# Altium PCB mic_usb_assy.PcbDoc
Units mm, origin at the board's own origin, x right, y up, seen from the top; angles counter-clockwise.
Board outline 18.15 x 36.98 mm, 2 copper layers (Top Layer, Bottom Layer), stack 0.8 mm thick; 3 components, 5 nets, 22 pads, 16 vias.
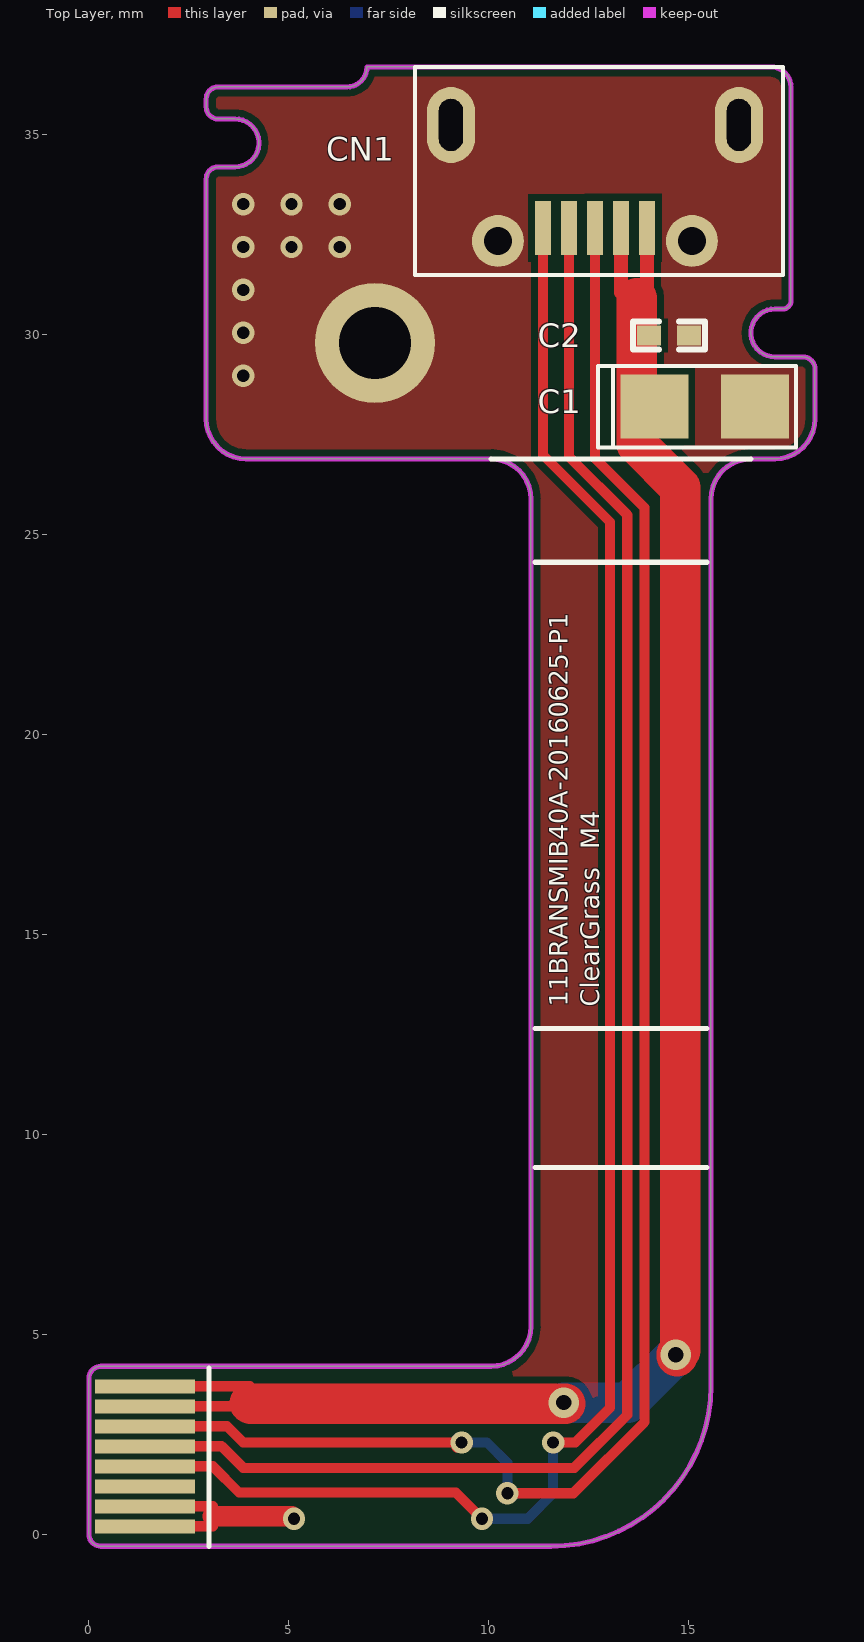
[diagram p0: Top Layer view]
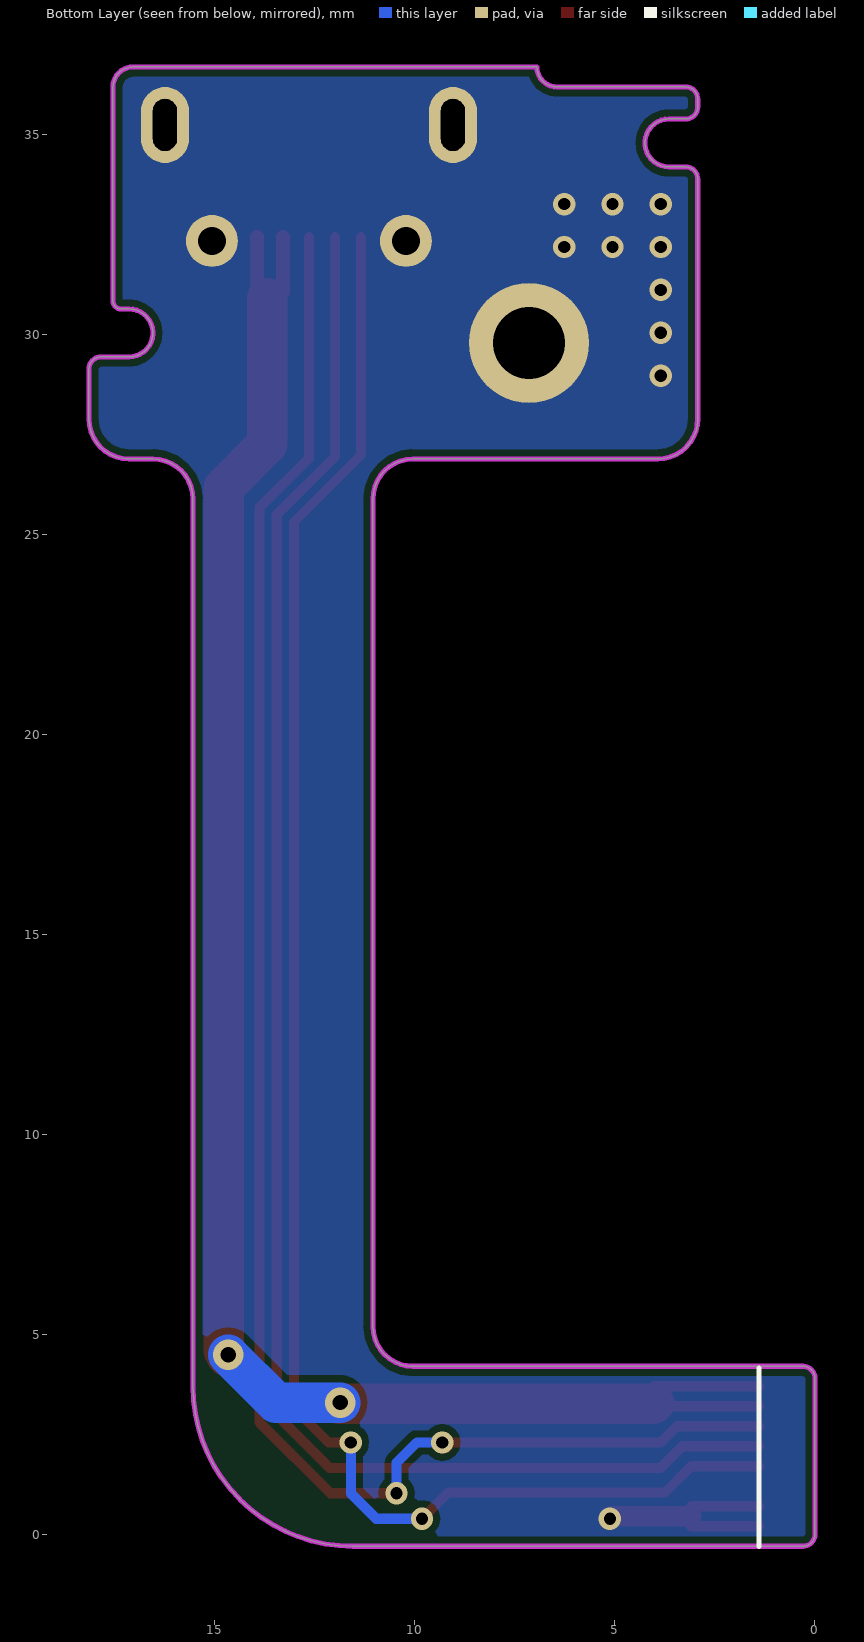
[diagram p1: Bottom Layer view, seen from below]

## Layer stack, top to bottom
Top Layer: signal copper 0.0356
Dielectric: core 0.729, FR-4, Dk 4.8
Bottom Layer: signal copper 0.0356

## Board outline
0.3,-0.3 cw(c0.3,0) 0,0 0,3.9 cw(c0.3,3.9) 0.3,4.2 10.05,4.2 ccw(c10.05,5.2) 11.05,5.2 11.05,25.883 ccw(c10.05,25.883) 10.05,26.883 3.93,26.883 cw(c3.93,27.883) 2.93,27.883 2.93,33.883 cw(c3.23,33.883) 3.23,34.183 3.65,34.183 ccw(c3.65,34.783) 3.65,35.383 3.23,35.383 cw(c3.23,35.683) 2.93,35.683 2.93,35.883 cw(c3.23,35.883) 3.23,36.183 6.45,36.183 ccw(c6.45,36.683) 6.95,36.683 17.05,36.683 cw(c17.05,36.183) 17.55,36.183 17.55,30.833 cw(c17.35,30.833) 17.35,30.633 17.15,30.633 ccw(c17.15,30.033) 17.15,29.433 17.85,29.433 cw(c17.85,29.133) 18.15,29.133 18.15,27.883 cw(c17.15,27.883) 17.15,26.883 16.55,26.883 ccw(c16.55,25.883) 15.55,25.883 15.55,3.7 cw(c11.55,3.7) 11.55,-0.3

## Design rules (kind name [scope] priority, off if disabled: settings)
Clearance [All] p1: gap=0.178
MinimumSolderMaskSliver [All] p1: minsoldermaskwidth=0
PolygonConnect [All] p1: connectstyle=Direct reliefconductorwidth=1.5 reliefentries=4 polygonreliefangle="90 Angle"
RoutingVias [All] p1: holewidth=0.711 width=1.27 viastyle="Through Hole" minholewidth=0.305 minwidth=0.559 maxholewidth=0.711 maxwidth=1.27
SilkToSilkClearance [All] p1: silktosilkclearance=0
SilkscreenOverComponentPads [IsPad] p1: minsilkscreentomaskgap=0
SolderMaskExpansion [All] p1: expansion=0.102
Width [All] p1: maxlimit=3 minlimit=0.254 preferedwidth=0.254
25 further rules are at their usual default settings.

## Components (designator, comment, footprint, x,y, rotation, side; value= is the part's Value field where it differs from the comment)
C1 "10uF/10V" 3216 15.391,28.19 r0 top
C2 "0.1uF" 0402C 14.502,29.968 r180 top
CN1 "475900001" MICRO-USB-乐沪 12.65,33.783 r180 top

## Footprints (in the part's own frame and the unit in brackets; to place one, negate y for a bottom-side part, rotate by r counter-clockwise, add the part's x,y. Pads: shape width x height; smd on the part's side, far side on the other; paste and mask are expansions set on the pad)
0402C [mm]
  rect 0.6x0.5 smd: 1(-0.5,0) 2(0.5,0)
  silkscreen extent -0.9,-0.35 0.9,0.35, body extent -0.51,-0.25 0.51,0.25, height 0.5
3216 [mm]
  rect 1.7x1.6 smd: 1(-1.256,0) 2(1.256,0)
  silkscreen extent -2.67,-1.02 2.29,1.02, body extent -1.72,-0.85 1.72,0.85, height 1.8
MICRO-USB-乐沪 [mm]
  rect 0.4x1.35 smd: 1(-1.3,1.125) 2(-0.65,1.125) 3(0,1.125) 4(0.65,1.125) 5(1.3,1.125)
  round 1.3 hole 0.7: 6(-2.425,1.45) 7(2.425,1.45)
  oval 1.2x1.9 hole 0.6 slot 1.3 at 90 deg: 8(-3.6,-1.45) 9(3.6,-1.45)
  silkscreen extent -4.7,-2.9 4.5,2.3

## Part data
C1: library part Capacitor
CN1: library part 47590

## Free pads (board coordinates)
  round 3 hole 1.8: 0(7.15,29.783)
  rect 2.5x0.35 smd: 1(1.4,3.7) 2(1.4,3.2) 3(1.4,2.7) 4(1.4,2.2) 5(1.4,0.2) 5(1.4,1.7) 6(1.4,1.2) 7(1.4,0.7)

## Via types
v1: diameter 0.559, hole 0.305, Top Layer to Bottom Layer, 14 vias
v2: diameter 0.762, hole 0.381, Top Layer to Bottom Layer, 2 vias

## Nets (pads, with @x,y where several pads share a name; then routed paths per layer and width w, separated by ;. In a path a pad name is that pad's centre, name@x,y a point inside that pad or via, vN(x,y) a via of type N, cw(c..) or ccw(c..) an arc to the next point about the centre after c; other vN are vias at no path point)
GND: C1.2 C2.1 CN1.6 CN1.7 CN1.8 CN1.9 pad.0 pad.5@1.4,0.2 pad.7 | length 5.9
  Top Layer w0.254: pad.5@1.4,0.2 3.094,0.2 3.094,0.45 3.094,0.7 pad.7
  Top Layer w0.508: 3.094,0.45 v1@5.066,0.45
  other v1: 5.126,0.39 3.856,28.965 3.856,30.037 3.856,31.109 3.856,32.182 5.063,32.182 6.269,32.182 3.856,33.254 5.063,33.254 6.269,33.254
MICRO_ID: CN1.5 pad.5@1.4,1.7 | length 44
  Top Layer w0.254: pad.5@1.4,1.7 3.094,1.7 3.749,1.045 9.17,1.045 v1(9.825,0.39) ; CN1.5@11.35,32.433 11.35,26.981 13.025,25.305 13.025,13.652 13.024,13.651 13.024,3.16 12.16,2.295 v1(11.603,2.295)
  Bottom Layer w0.254: v1(9.825,0.39) 10.968,0.39 11.603,1.025 v1(11.603,2.295)
MICRO_N: CN1.3 pad.3 | length 44.7
  Top Layer w0.254: pad.3 3.451,2.7 3.856,2.295 v1(9.317,2.295) v1@9.19,2.168 ; v1(10.46,1.025) 12.111,1.025 13.889,2.803 13.889,3.023 13.888,3.024 13.888,13.294 13.889,13.295 13.889,25.663 12.65,26.902 CN1.3@12.65,32.433
  Bottom Layer w0.254: v1(9.317,2.295) 9.952,2.295 10.46,1.787 v1(10.46,1.025)
MICRO_P: CN1.4 pad.4 | length 42.9
  Top Layer w0.254: pad.4 3.316,2.2 3.856,1.66 12.135,1.66 13.456,2.981 13.456,13.472 13.457,13.473 13.457,25.484 12,26.941 CN1.4@12,32.433
USB_5V: C1.1 C2.2 CN1.1 CN1.2 pad.1 pad.2 | length 46.6
  Top Layer w0.254: pad.2 4.348,3.2 ; pad.1 4.026,3.7
  Top Layer w0.356: 13.3,31.043 CN1.2@13.3,32.433 ; 13.95,30.901 CN1.1@13.95,32.433
  Top Layer w1.016: 4.026,3.275 4.04,3.26 v2@11.912,3.26 ; 13.696,30.901 13.696,27.253 14.778,26.171 14.778,4.595 14.701,4.518 v2@14.701,4.454
  Bottom Layer w1.016: v2(11.867,3.292) 13.475,3.292 v2(14.669,4.486)

## Polygon pours and split planes (outlines as drawn)
GND on Bottom Layer "TOP-No Net 1" (solid, remove dead copper, pour order 7): 1.824,38.49 1.951,38.617 18.842,38.617 18.842,2.422 16.048,-0.372 13.889,-2.531 -0.335,-2.531 -0.335,5.089 -0.462,5.216 9.571,5.216 9.571,24.901 10.333,25.663 9.952,25.282 2.713,25.282
GND on Top Layer "TOP-No Net 1" (solid, remove dead copper, pour order 9): 2.332,37.982 18.715,37.982 19.096,38.363 18.461,37.728 18.461,-0.245 17.572,-0.245 15.286,-2.531 14.905,-2.912 -0.716,-2.912 -0.716,5.089 -0.208,5.597 0.173,5.216 9.317,5.216 9.317,25.663 8.682,26.298 8.301,25.917 0.681,25.917

## Keep-outs
Keep-Out Layer:
  the board outline again, w0.127

## Silkscreen, mask and mechanical layers (free items; w line width, h text height)
Top Overlay:
  lines w0.127: 3,-0.3 3,4.153 ; 10.05,26.883 16.55,26.883 ; 11.15,9.173 15.45,9.173 ; 11.15,12.646 15.45,12.646 ; 11.15,24.301 15.45,24.301
  text "M4" at 12.919,17.125 h0.8 r90
  text "11BRANSMIB40A-20160625-P1" at 12.136,13.188 h0.8 r90
  text "ClearGrass" at 12.919,13.188 h0.8 r90
Bottom Overlay:
  lines w0.127: 1.4,-0.3 1.4,4.153